# Altium PCB 稳压电源.PcbDoc
Units mil, origin at the board's own origin, x right, y up, seen from the top; angles counter-clockwise.
Board outline 5315 x 4295 mil, 2 copper layers (Top Layer, Bottom Layer); 25 components, 13 nets, 66 pads, 13 vias.
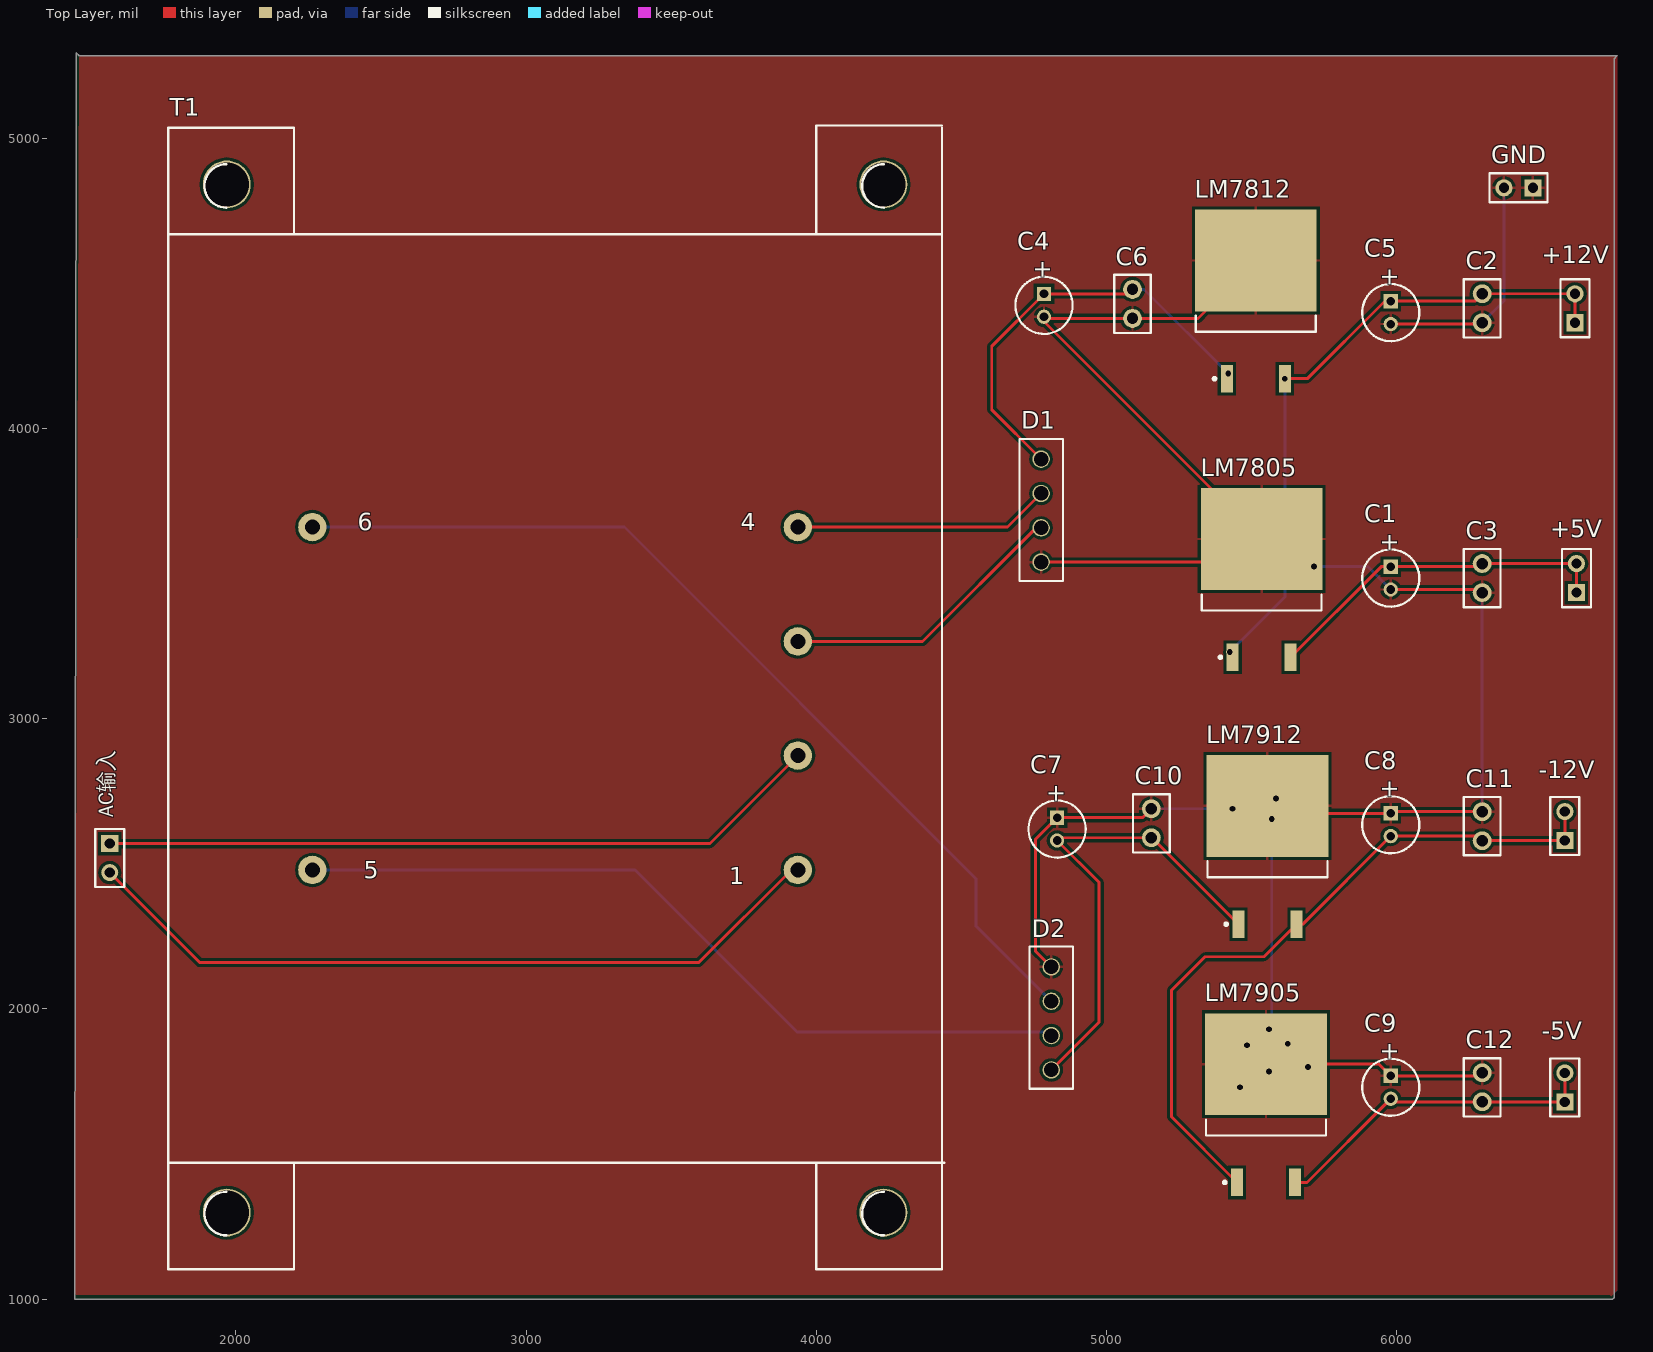
[diagram p0: Top Layer view]
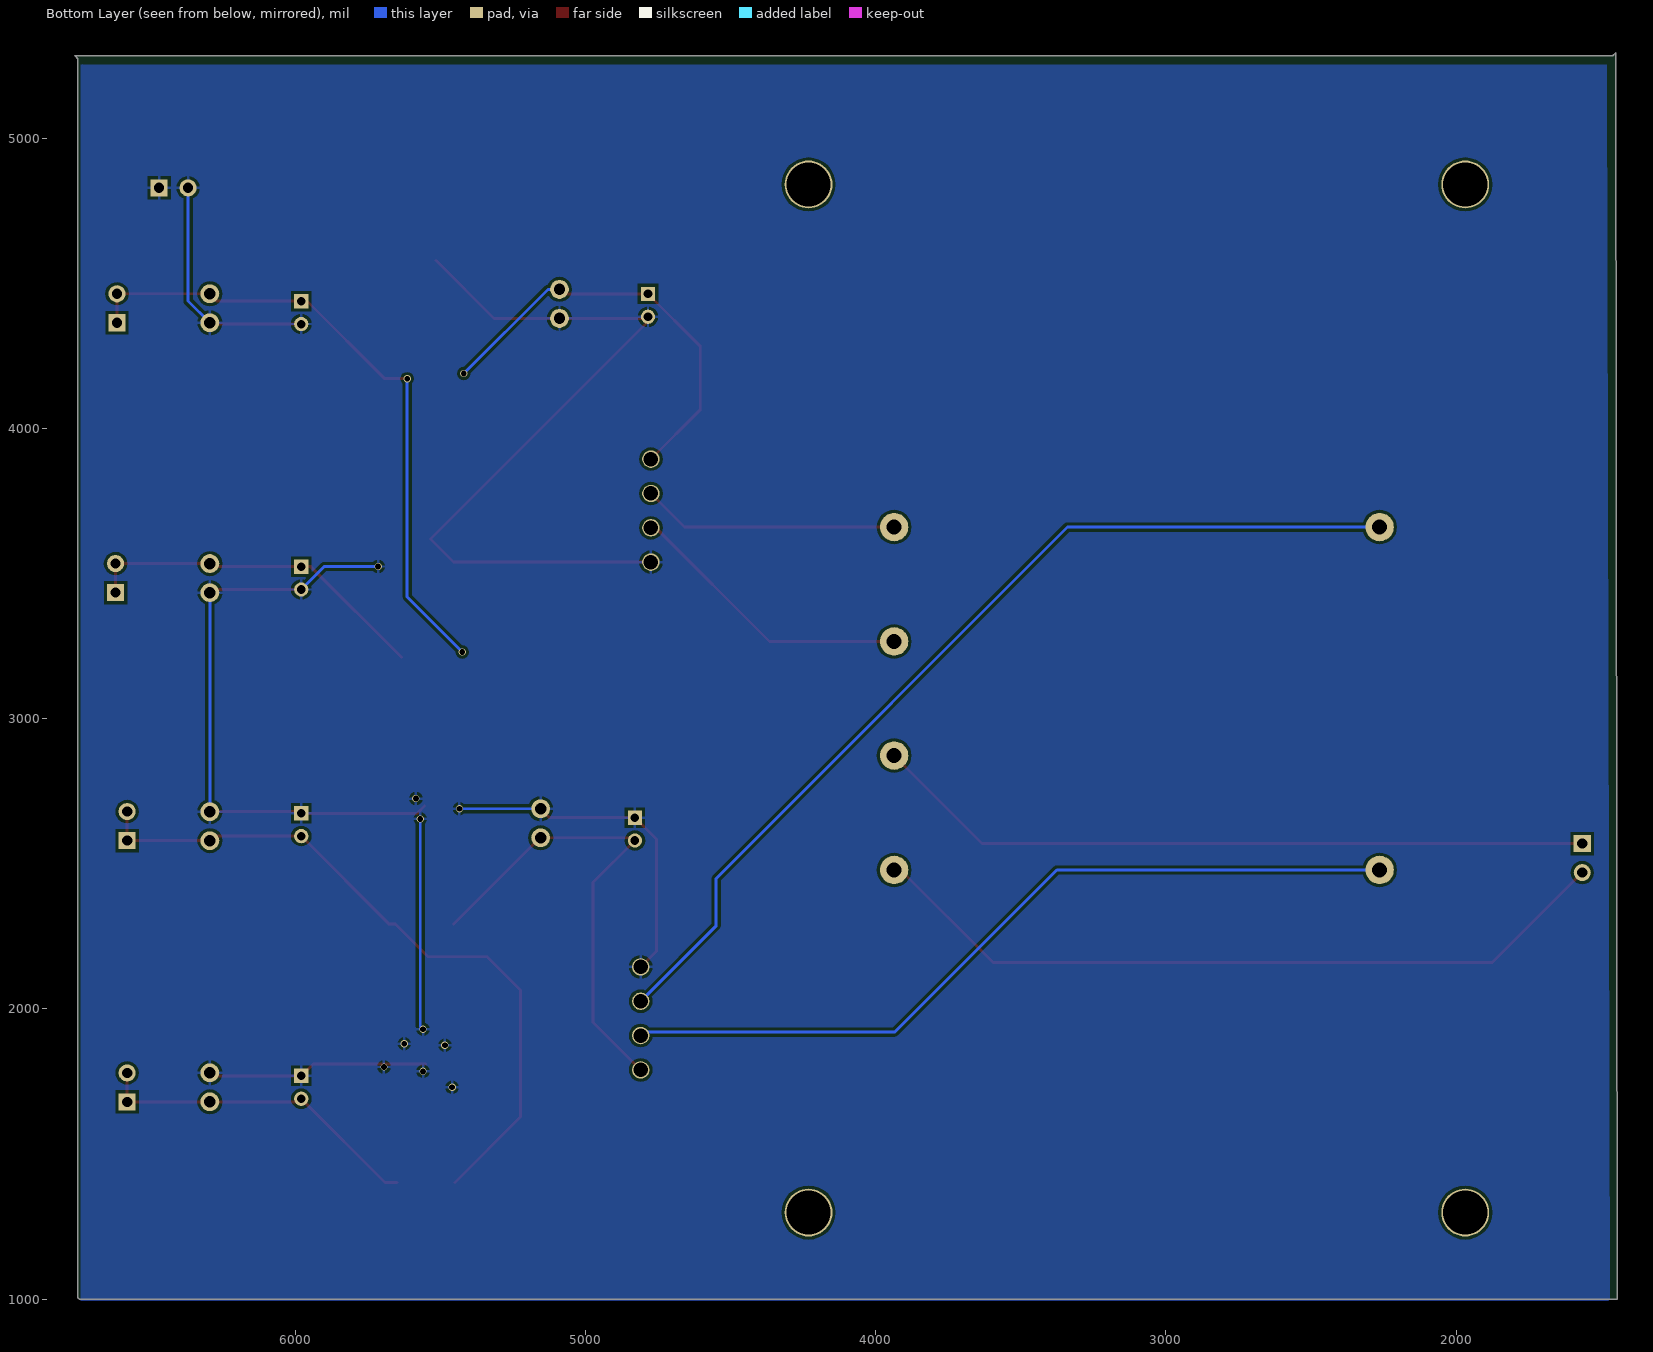
[diagram p1: Bottom Layer view, seen from below]

## Layer stack, top to bottom
Top Layer: signal copper 1.4
Dielectric: dielectric 12.6, FR-4, Dk 4.8
Bottom Layer: signal copper 1.4

## Board outline
1450,5295 1460,5285 6760,5285 6750,5275 6750,1005 6745,1000 1445,1000

## Design rules (kind name [scope] priority, off if disabled: settings)
Clearance [All] p1: gap=10
PolygonConnect [All] p1: connectstyle=Relief reliefconductorwidth=10 reliefentries=4 polygonreliefangle="90 Angle" airgapwidth=10
RoutingVias [All] p1: holewidth=28 width=50 viastyle="Through Hole" minholewidth=28 minwidth=50 maxholewidth=28 maxwidth=50
SolderMaskExpansion [All] p1: expansion=4
Width [All] p1: maxlimit=10 minlimit=10 preferedwidth=10
28 further rules are at their usual default settings.

## Components (designator, comment, footprint, x,y, rotation, side; value= is the part's Value field where it differs from the comment)
+5V "+5V" HDR1X2 6620,3435 r90 top (schematic designator P2)
+12V "+12V" HDR1X2 6615,4365 r90 top (schematic designator P1)
-5V "-5V" HDR1X2 6580,1679.61 r90 top (schematic designator P6)
-12V "-12V" HDR1X2 6580,2580.39 r90 top (schematic designator P5)
AC输入 "Header 2" HDR1X2 1565,2570 r270 top (schematic designator P3)
C1 "Cap Pol1" CAPPR2-5x6.8 5980,3485 r270 top
C2 "Cap" CAPR2.54-5.1x3.2 6295,4415 r90 top
C3 "Cap" CAPR2.54-5.1x3.2 6295,3485 r90 top
C4 "Cap Pol1" CAPPR2-5x6.8 4785,4425 r270 top
C5 "Cap Pol1" CAPPR2-5x6.8 5980,4400 r270 top
C6 "Cap" CAPR2.54-5.1x3.2 5090,4430 r90 top
C7 "Cap Pol1" CAPPR2-5x6.8 4830,2620 r270 top
C8 "Cap Pol1" CAPPR2-5x6.8 5980,2635 r270 top
C9 "Cap Pol1" CAPPR2-5x6.8 5980,1730 r270 top
C10 "Cap" CAPR2.54-5.1x3.2 5155,2640 r90 top
C11 "Cap" CAPR2.54-5.1x3.2 6295,2630 r90 top
C12 "Cap" CAPR2.54-5.1x3.2 6295,1730 r90 top
D1 "Bridge1" 整流桥 4775,3810 r0 top
D2 "Bridge2" 整流桥 4810,2060 r0 top
GND "Header 2" HDR1X2 6470,4830 r180 top (schematic designator P4)
LM7805 "Volt Reg" TO254P1510-3_4N 5535,3480 r90 top
LM7812 "Volt Reg" TO254P1510-3_4N 5515,4440 r90 top
LM7905 "Volt Reg" TO254P1510-3_4N 5550,1670 r90 top
LM7912 "Volt Reg" TO254P1510-3_4N 5555,2560 r90 top
T1 "Trans3" TRF_6 3100,3070 r0 top

## Footprints (in the part's own frame and the unit in brackets; to place one, negate y for a bottom-side part, rotate by r counter-clockwise, add the part's x,y. Pads: shape width x height; smd on the part's side, far side on the other; paste and mask are expansions set on the pad)
CAPPR2-5x6.8 [mm] "Capacitor, Electrolytic, Radial; Body 5 x 6.8 mm (Dia.xH typ); Pin Spacing 2 mm (typ)"
  rect 1.25x1.25 hole 0.75: 1(-1,0)
  round 1.25 hole 0.75: 2(1,0)
  silkscreen extent -2.5,-2.5 2.5,2.5
CAPR2.54-5.1x3.2 [mm] "Capacitor, Ceramic, Thru-Hole, Dipped Radial; Body 5.1 x 3.2 mm (WxT) Pin Spacing 2.54 mm (typ)"
  round 1.65 hole 1: 1(-1.27,0) 2(1.27,0)
  silkscreen extent -2.55,-1.6 2.55,1.6
HDR1X2 [mm] "Connector; Header; 2 Position"
  rect 1.5x1.5 hole 0.9: 1(0,0)
  round 1.5 hole 0.9: 2(2.54,0)
  silkscreen extent -1.27,-1.27 3.81,1.27
TO254P1510-3_4N [mm] "D2-PAK, 4-Leads, Body 8.8x10.4mm, Pitch 2.54mm, Lead Span 15.1mm, IPC Medium Density"
  rect 2.4x1.05 smd: 1(-6.8,2.54) 3(-6.8,-2.54)
  rect 8.9x10.65 smd: 2(3.55,0)
  silkscreen extent -6.92,-5.25 -1.3,5.25, body extent -2.7,-5.28 6.3,5.28, height 4.69
TRF_6 [mil] "Three-winding Transformer (Non-Ideal); 6 Leads"
  round 98 hole 52: 1(836.67,-590.83) 2(836.67,-196.67) 3(836.67,196.67) 4(836.67,590.83) 5(-836.67,-590.83) 6(-836.67,590.83)
  round 165 hole 152: MH1(-1131.67,-1771.67) MH2(1131.67,-1771.67) MH3(1131.67,1771.67) MH4(-1131.67,1771.67)
  silkscreen extent -1333,-1967 1342,1975
整流桥 [mil]
  round 60 hole 50: 1(0,85) 2(0,-33.33) 3(0,-270) 4(0,-151.67)
  silkscreen extent -75,-335 75,155

## Part data
+5V +12V -5V -12V: library part "Header 2", "Header, 2-Pin"
AC输入 GND: "Header, 2-Pin"
C1 C4 C5 C7 C8 C9: "Polarized Capacitor (Radial)"
C2 C3 C6 C10 C11 C12: "Capacitor"
D1: "Full Wave Diode Bridge"
D2: library part Bridge1, "Full Wave Diode Bridge"
LM7805 LM7812 LM7905 LM7912: "Voltage Regulator"
T1: "Three-winding Transformer (Non-Ideal)"

## Via types
v1: diameter 25, hole 20, Top Layer to Bottom Layer, 13 vias

## Nets (pads, with @x,y where several pads share a name; then routed paths per layer and width w, separated by ;. In a path a pad name is that pad's centre, name@x,y a point inside that pad or via, vN(x,y) a via of type N, cw(c..) or ccw(c..) an arc to the next point about the centre after c; other vN are vias at no path point)
+5V: +5V.1 +5V.2 C1.1 C3.2 LM7805.3 | length 1218.7
  Top Layer w10: LM7805.3 5947.09,3524.37 C1.1 6284.37,3524.37 C3.2 +5V.2 +5V.1
+12V: +12V.1 +12V.2 C2.2 C5.1 LM7805.1 LM7812.3 | length 2215.4
  Top Layer w10: v1(5615,4172.28) 5692.28,4172.28 5955,4435 ; C5.1 6269.37,4439.37 C2.2 +12V.2 +12V.1
  Bottom Layer w10: v1(5425,3230) 5615,3420 v1(5615,4172.28)
-5V: -5V.1 -5V.2 C9.2 C12.1 LM7905.3 | length 1145.2
  Top Layer w10: LM7905.3 5691.65,1402.28 5969.37,1680 C12.1 6295.39,1679.61 -5V.1 -5V.2
-12V: -12V.1 -12V.2 C8.2 C11.1 LM7905.1 LM7912.3 | length 2437.3
  Top Layer w10: LM7905.1 5225,1627.28 5225,2065 5340,2180 5542.72,2180 LM7912.3 5676.65,2292.28 C8.2 6279.37,2595.63 C11.1 6579.61,2580 -12V.1 -12V.2
GND: C1.2 C2.1 C3.1 C4.2 C5.2 C6.1 C7.1 C8.1 C9.1 C10.2 C11.2 C12.2 D1.3 D2.1 GND.1 GND.2 LM7805.2 LM7812.2 LM7905.2 LM7912.2 | length 8303.8
  Top Layer w10: D1.3 5455.24,3540 LM7805.2 4785,4369.76 C4.2 4790.63,4380 C6.1 5315.24,4380 LM7812.2 ; D2.1 4755,2200 4755,2584.37 C7.1 5124.37,2659.37 C10.2 ; LM7905.2 5939.61,1809.76 C9.1 6284.37,1769.37 C12.2 ; LM7912.2 5580.39,2674.37 C8.1 5985.63,2680 C11.2 ; C1.2 6284.37,3445.63 C3.1 ; C5.2 6290.63,4360.63 C2.1
  Bottom Layer w10: C10.2 v1(5435,2690) ; v1(5560,1930) 5570,1940 v1(5570,2655) ; v1(5715,3525) 5900.63,3525 C1.2 ; C11.2 C3.1 ; C2.1 6370,4440 GND.2
  other v1: 5460,1730 5560,1785 5695,1800 5485,1875 5625,1880 5585,2725
NetC4_1: C4.1 C6.2 D1.1 LM7812.1 | length 1475.9
  Top Layer w10: D1.1 4605,4065 4605,4284.37 C4.1 5074.37,4464.37 C6.2
  Bottom Layer w10: C6.2 5130,4480 v1(5420,4190)
NetC7_2: C7.2 C10.1 D2.3 LM7912.1 | length 1671.2
  Top Layer w10: D2.3 4975,1955 4975,2435.63 C7.2 4839.37,2590 C10.1 5157.28,2590 LM7912.1
NetD1_2: D1.2 T1.4 | length 886.3
  Top Layer w10: T1.4 4659.17,3660.83 D1.2
NetD1_4: D1.4 T1.3 | length 1000.6
  Top Layer w10: T1.3 4366.67,3266.67 4758.33,3658.33 D1.4
NetD2_2: D2.2 T1.6 | length 3319.2
  Bottom Layer w10: T1.6 3339.17,3660.83 4550,2450 4550,2286.67 D2.2
NetD2_4: D2.4 T1.5 | length 2783.1
  Bottom Layer w10: T1.5 3375.83,2479.17 3935,1920 4798.33,1920 D2.4
NetP3_1: AC输入.1 T1.2 | length 2497.3
  Top Layer w10: AC输入.1 3633.33,2570 T1.2
NetP3_2: AC输入.2 T1.1 | length 2632.3
  Top Layer w10: AC输入.2 1875,2160 3595,2160 3914.17,2479.17 T1.1
pads on no net: T1.MH1 T1.MH2 T1.MH3 T1.MH4

## Polygon pours and split planes (outlines as drawn)
GND on Bottom Layer "Drill Guide-No Net" (solid, remove dead copper, pour order 2): 1480,5255 6735,5255 6745,5265 6740,5260 6740,995 1475,995 1470,1000
GND on Top Layer "Drill Guide-No Net" (solid, remove dead copper, pour order 4): 1460,5280 1465,5285 6760,5285 6760,1030 6740,1010 6735,1015 1445,1015

## Text inside footprints (layer, text, board x,y; h text height)
C1: Top Overlay "+" at 5950.47,3641.5 h59.06 r270
C4: Top Overlay "+" at 4755.47,4581.5 h59.06 r270
C5: Top Overlay "+" at 5950.47,4556.5 h59.06 r270
C7: Top Overlay "+" at 4800.47,2776.5 h59.06 r270
C8: Top Overlay "+" at 5950.47,2791.5 h59.06 r270
C9: Top Overlay "+" at 5950.47,1886.5 h59.06 r270
T1: Top Overlay "6" at 2420,3650 h59.06; Top Overlay "4" at 3740,3650 h59.06; Top Overlay "1" at 3700,2430 h59.06; Top Overlay "5" at 2440,2450 h59.06